# Altium PCB PocketLab_DMM_EVT0.PcbDoc (part 2 of 3)
Units mm, origin at the board's own origin, x right, y up, seen from the top; angles counter-clockwise.
Board outline 62 x 90 mm, 4 copper layers (Top Layer, GND, PWR_SIG, Bottom Layer), stack 1.04 mm thick; 103 components, 76 nets, 390 pads, 94 vias.
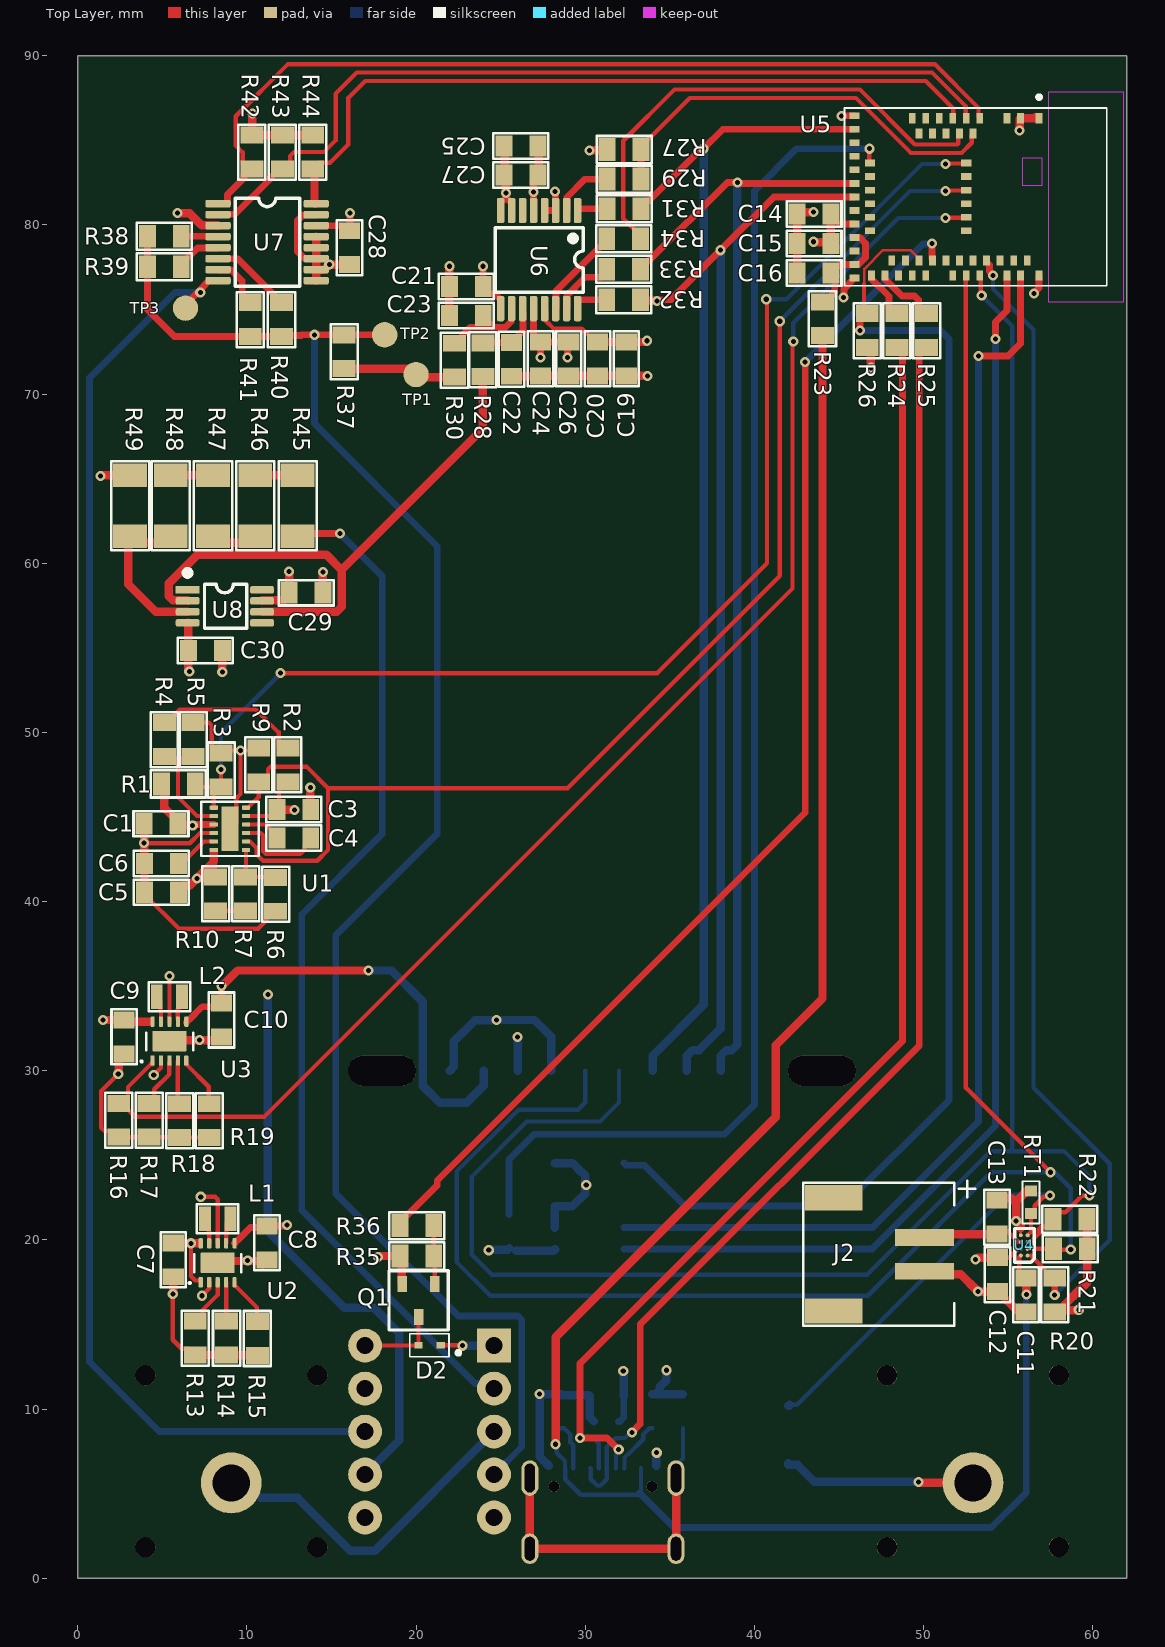
[diagram p0: Top Layer view]

## Part data (continued)
L1 L2: library part 74479275222, "FIXED IND 2.2UH 2A 190 MOHM SMD", Ambient Temperature Range High=85°C, Ambient Temperature Range Low=-40°C, Case Code (Imperial)=0805, Case Code (Metric)=2012, Current Rating=1A, DC Resistance (DCR)=166mΩ, Inductance Tolerance=20%, Manufacturer="Wurth Elektronik", Manufacturer Lifecycle Status=ACTIVE, Max Operating Temperature=125°C, RMS Current (Irms)=1.3A, Saturation Current=1.2A, Self Resonant Frequency=40MHz, Supplier Part Number=732-9708-1-ND, Test Frequency=1MHz, Case/Package=0805, Category="Fixed Inductors", ComponentLink1Description=https://datasheet.octopart.com:443/74479275222-W%C3%BCrth-Elektronik-datasheet-155263601.pdf?src-supplier=Wurth+Elektronik, ComponentLink1URL=https://datasheet.octopart.com:443/74479275222-W%C3%BCrth-Elektronik-datasheet-155263601.pdf?src-supplier=Wurth+Elektronik, ComponentLink2Description=https://datasheet.octopart.com:443/74479275222-Wurth-Elektronik-datasheet-181536646.pdf?src-supplier=Newark, ComponentLink2URL=https://datasheet.octopart.com:443/74479275222-Wurth-Elektronik-datasheet-181536646.pdf?src-supplier=Newark, ComponentLink3Description=https://datasheet.octopart.com:443/74479275222-W%C3%BCrth-Elektronik-datasheet-62333429.pdf?src-supplier=element14+APAC, ComponentLink3URL=https://datasheet.octopart.com:443/74479275222-W%C3%BCrth-Elektronik-datasheet-62333429.pdf?src-supplier=element14+APAC, ESR=176mΩ, Height=1mm, Height - Seated (Max)=1.4478mm, Length=2mm, Lifecycle Status=Production, Manufacturer Part Number=74479275222, Min Operating Temperature=-40°C, Mounting Technology="Surface Mount", Pins=2, Pricing="1=1.27, 50=1.056, 100=0.915, 1000=0.832 (USD)", REACH SVHC=Unknown, RoHS=Compliant, Shielding=Shielded, Stock=6231, Supplier=DigiKey, Tolerance=20%, Width=1.25mm, YEOL="1 = Estimated lifetime > 10 years"
Q1: "TRANS NPN 40V 0.2A SOT23-3", Case/Package=SOT-23, Clock Frequency=300MHz, Collector Base Voltage (VCBO)=60V, Collector Emitter Breakdown Voltage=40V, Collector Emitter Saturation Voltage=200mV, Current Rating=200mA, Emitter Base Voltage (VEBO)=6V, Manufacturer=onsemi, Manufacturer Lifecycle Status=ACTIVE, Max Junction Temperature (Tj)=150°C, Max Power Dissipation=300mW, Min Operating Temperature=-55°C, Power Dissipation=225mW, Supplier Part Number=MMBT3904LT1GOSDKR-ND, Category=BJTs, China RoHS=Compliant, Collector Emitter Voltage (VCEO)=40V, ComponentLink1Description=https://datasheet.octopart.com:443/MMBT3904LT1G-ON-Semiconductor-datasheet-11971584.pdf?src-supplier=Upverter, ComponentLink1URL=https://datasheet.octopart.com:443/MMBT3904LT1G-ON-Semiconductor-datasheet-11971584.pdf?src-supplier=Upverter, ComponentLink2Description=https://datasheet.octopart.com:443/MMBT3904LT1G-ON-Semiconductor-datasheet-618661.pdf?src-supplier=Upverter, ComponentLink2URL=https://datasheet.octopart.com:443/MMBT3904LT1G-ON-Semiconductor-datasheet-618661.pdf?src-supplier=Upverter, ComponentLink3Description=https://datasheet.octopart.com:443/MMBT3904LT1G-ON-Semiconductor-datasheet-8327178.pdf?src-supplier=Upverter, ComponentLink3URL=https://datasheet.octopart.com:443/MMBT3904LT1G-ON-Semiconductor-datasheet-8327178.pdf?src-supplier=Upverter, ComponentLink4Description=https://sigma.octopart.com:443/138897241/technical_drawing/ON-Semiconductor-MMBT3904LT1G.pdf?src-supplier=Upverter, ComponentLink4URL=https://sigma.octopart.com:443/138897241/technical_drawing/ON-Semiconductor-MMBT3904LT1G.pdf?src-supplier=Upverter, ComponentLink5Description=https://datasheet.octopart.com:443/MMBT3904LT1G-ON-Semiconductor-datasheet-94100684.pdf?src-supplier=Newark, ComponentLink5URL=https://datasheet.octopart.com:443/MMBT3904LT1G-ON-Semiconductor-datasheet-94100684.pdf?src-supplier=Newark, ComponentLink6Description=https://datasheet.octopart.com:443/MMBT3904LT1G-onsemi-datasheet-175423507.pdf?src-supplier=IHS, ComponentLink6URL=https://datasheet.octopart.com:443/MMBT3904LT1G-onsemi-datasheet-175423507.pdf?src-supplier=IHS, ComponentLink7Description=https://datasheet.octopart.com:443/MMBT3904LT1G-ON-Semiconductor-datasheet-15850735.pdf?src-supplier=element14+APAC, ComponentLink7URL=https://datasheet.octopart.com:443/MMBT3904LT1G-ON-Semiconductor-datasheet-15850735.pdf?src-supplier=element14+APAC, ComponentLink8Description=https://datasheet.octopart.com:443/MMBT3904LT1G-onsemi-datasheet-157205106.pdf?src-supplier=TME, ComponentLink8URL=https://datasheet.octopart.com:443/MMBT3904LT1G-onsemi-datasheet-157205106.pdf?src-supplier=TME, ComponentLink9Description=https://datasheet.octopart.com:443/MMBT3904LT1G-ON-Semiconductor-datasheet-42916338.pdf?src-supplier=Seeed+Studio, ComponentLink9URL=https://datasheet.octopart.com:443/MMBT3904LT1G-ON-Semiconductor-datasheet-42916338.pdf?src-supplier=Seeed+Studio, ComponentLink10Description=https://datasheet.octopart.com:443/MMBT3904LT1G-ON-Semiconductor-datasheet-14065146.pdf?src-supplier=iiiC, ComponentLink10URL=https://datasheet.octopart.com:443/MMBT3904LT1G-ON-Semiconductor-datasheet-14065146.pdf?src-supplier=iiiC, ComponentLink11Description=https://datasheet.octopart.com:443/MMBT3904LT1G-onsemi-datasheet-11078203.pdf?src-supplier=Master+Electronics, ComponentLink11URL=https://datasheet.octopart.com:443/MMBT3904LT1G-onsemi-datasheet-11078203.pdf?src-supplier=Master+Electronics, ComponentLink12Description=https://datasheet.octopart.com:443/MMBT3904LT1G-ON-Semiconductor-datasheet-9992889.pdf?src-supplier=RS+(Formerly+Allied+Electronics), ComponentLink12URL=https://datasheet.octopart.com:443/MMBT3904LT1G-ON-Semiconductor-datasheet-9992889.pdf?src-supplier=RS+(Formerly+Allied+Electronics), ComponentLink13Description=http://sigma.octopart.com:80/150618431/rohs_statement/ON-Semiconductor-MMBT3904LT1G.pdf?src-supplier=Compliance+Statements, ComponentLink13URL=http://sigma.octopart.com:80/150618431/rohs_statement/ON-Semiconductor-MMBT3904LT1G.pdf?src-supplier=Compliance+Statements, ComponentLink14Description=http://sigma.octopart.com:80/reach_statement/ON-Semiconductor-company-79.pdf?src-supplier=Compliance+Statements, ComponentLink14URL=http://sigma.octopart.com:80/reach_statement/ON-Semiconductor-company-79.pdf?src-supplier=Compliance+Statements, ComponentLink15Description=http://sigma.octopart.com:80/rohs_statement/Fairchild-Semiconductor-company-11.pdf?src-supplier=Compliance+Statements, ComponentLink15URL=http://sigma.octopart.com:80/rohs_statement/Fairchild-Semiconductor-company-11.pdf?src-supplier=Compliance+Statements, ComponentLink16Description=http://sigma.octopart.com:80/rohs_statement/Fairchild-Semiconductor-company-10.pdf?src-supplier=Compliance+Statements, ComponentLink16URL=http://sigma.octopart.com:80/rohs_statement/Fairchild-Semiconductor-company-10.pdf?src-supplier=Compliance+Statements, ComponentLink17Description=http://sigma.octopart.com:80/reach_statement/Fairchild-Semiconductor-company-9.pdf?src-supplier=Compliance+Statements, ComponentLink17URL=http://sigma.octopart.com:80/reach_statement/Fairchild-Semiconductor-company-9.pdf?src-supplier=Compliance+Statements, ComponentLink18Description=https://octopart.com:443/opatz8j6/c1?t=6Xn7ZrF6hysOUC84qlrSqY4wiQdrN-mPXKQ_8Rla8IkVly0DBC3XMOxgBnPoFxbPxSduxt1CU9xvbCNH0dZZ2fSPxrCiu0NHjXK1AEqfl5xODuP5YJP7pfSgZ8QNFl02tAnTqW6w1aVJmMTvNdbX5LfPzPLhtU1PYqNVsEPH2I4uNn2UF3IV2P2UT1zVRcnQIPoIWXKohBgaCPKWifMJG2N61Au2Wz4170xn6Vu5FG_CLPs0I4wu6gksT39gSmG6GKW27rzSZjefFxUNhsDMvXXdZPXoa_giO80NkyKEb8_6ha9AliWeLbEvMGgfnng9nYF8sw6XCX6uqkfeLxUIFVSSx4aXaZZhz9egcw&src-supplier=Compliance+Statements, ComponentLink18URL=https://octopart.com:443/opatz8j6/c1?t=6Xn7ZrF6hysOUC84qlrSqY4wiQdrN-mPXKQ_8Rla8IkVly0DBC3XMOxgBnPoFxbPxSduxt1CU9xvbCNH0dZZ2fSPxrCiu0NHjXK1AEqfl5xODuP5YJP7pfSgZ8QNFl02tAnTqW6w1aVJmMTvNdbX5LfPzPLhtU1PYqNVsEPH2I4uNn2UF3IV2P2UT1zVRcnQIPoIWXKohBgaCPKWifMJG2N61Au2Wz4170xn6Vu5FG_CLPs0I4wu6gksT39gSmG6GKW27rzSZjefFxUNhsDMvXXdZPXoa_giO80NkyKEb8_6ha9AliWeLbEvMGgfnng9nYF8sw6XCX6uqkfeLxUIFVSSx4aXaZZhz9egcw&src-supplier=Compliance+Statements, ComponentLink19Description=https://octopart.com:443/opatz8j6/c1?t=8IRzLcMOYTb9JijI-po6TFZCAUzXib-H1R20XCLpzmhIGre0bWRXe4ZO8lRdDfF3CLOGncXrdohN3KmiOTqxwjTHC1r89hWIZDbBVEUVc9Q9O159qKwDTUXpIzAsHJigIaeBGLyIo10FCT0IJpWkJe3Af8Ts36u8FHUZlIMCnry_JzPNglOFJd8Q37gYK_hPK5FL94xWLlsZYNj58V_g4S0R_SZTueiY5oHGNdfq_Zs3fbV3kHE__W-q6emv4yhSM8EHIIJwaXdr2iL-5-sB4yTOqwO_ItA84y4jC2VE_619edN7Ju53SNxRGHixzhXtKIq-sYkPqUptt85PTjBtSIydYnRzf0D6rRR5&src-supplier=Compliance+Statements, ComponentLink19URL=https://octopart.com:443/opatz8j6/c1?t=8IRzLcMOYTb9JijI-po6TFZCAUzXib-H1R20XCLpzmhIGre0bWRXe4ZO8lRdDfF3CLOGncXrdohN3KmiOTqxwjTHC1r89hWIZDbBVEUVc9Q9O159qKwDTUXpIzAsHJigIaeBGLyIo10FCT0IJpWkJe3Af8Ts36u8FHUZlIMCnry_JzPNglOFJd8Q37gYK_hPK5FL94xWLlsZYNj58V_g4S0R_SZTueiY5oHGNdfq_Zs3fbV3kHE__W-q6emv4yhSM8EHIIJwaXdr2iL-5-sB4yTOqwO_ItA84y4jC2VE_619edN7Ju53SNxRGHixzhXtKIq-sYkPqUptt85PTjBtSIydYnRzf0D6rRR5&src-supplier=Compliance+Statements, Contact Plating=Tin, Element Configuration=Single, Frequency=300MHz, Gain Bandwidth Product=300MHz, Height=1.11mm, hFE Min=30, Lead Free="Lead Free", Length=2.9mm, Lifecycle Status=Production, Manufacturer Part Number=MMBT3904LT1G, Max Breakdown Voltage=40V, Max Collector Current=200mA, Max Operating Temperature=150°C, Number of Elements=1, Number of Terminals=3, Packaging="Tape and Reel", Pins=3, Polarity=NPN, Pricing="1=0.14, 10=0.086, 100=0.0527, 500=0.03806, 1000=0.03329 (USD)", Radiation Hardening=No, REACH SVHC=Yes, RoHS=Compliant, Schedule B=8541210080, Stock=189758, Supplier=DigiKey, Transition Frequency=300MHz, Type="General Purpose", Voltage Rating (DC)=40V, Width=1.3mm
R1 R2 R3 R4 R5 R6 R7 R8 R9 R10 R11 R12 R13 R14 R15 R16 R17 R18 R19 R20 R21 R22 R23 R24 R25 R26 R27 R28 R29 R30 R31 R32 R33 R34 R35 R36 R37 R38 R39 R40 R41 R42 R43 R44 R50: library part R_0805, "RES 1/8W 0805", Case Code (Imperial)=0805, Case Code (Metric)=2012, Manufacturer="Stackpole Electronics", Manufacturer Package Identifier="0805 (2012 metric)", Manufacturer Part Number=RNCF0805TKY10K0, Max Operating Temperature=155°C, Max Power Dissipation=125mW, Min Operating Temperature=-55°C, Ratings=AEC-Q200, Supplier Part Number=RNCF0805TKY10K0CT-ND, Temperature Coefficient=5ppm/°C, Tolerance=0.01%, Working Voltage=150V, Case/Package=0805, Category="Chip SMD Resistors", ComponentLink1Description=https://datasheet.octopart.com:443/RNCF0805TKY10K0-Stackpole-Electronics-datasheet-182148124.pdf?src-supplier=IHS, ComponentLink1URL=https://datasheet.octopart.com:443/RNCF0805TKY10K0-Stackpole-Electronics-datasheet-182148124.pdf?src-supplier=IHS, ComponentLink2Description=https://datasheet.octopart.com:443/RNCF0805TKY10K0-Stackpole-Electronics-datasheet-12511394.pdf?src-supplier=Factory+Futures, ComponentLink2URL=https://datasheet.octopart.com:443/RNCF0805TKY10K0-Stackpole-Electronics-datasheet-12511394.pdf?src-supplier=Factory+Futures, ComponentLink3Description=https://datasheet.octopart.com:443/RNCF0805TKY10K0-Stackpole-Electronics-datasheet-141158876.pdf?src-supplier=Stackpole+Electronics, ComponentLink3URL=https://datasheet.octopart.com:443/RNCF0805TKY10K0-Stackpole-Electronics-datasheet-141158876.pdf?src-supplier=Stackpole+Electronics, ComponentLink4Description=https://datasheet.octopart.com:443/RNCF0805TKY10K0-Stackpole-Electronics-datasheet-28504821.pdf?src-supplier=Master+Electronics, ComponentLink4URL=https://datasheet.octopart.com:443/RNCF0805TKY10K0-Stackpole-Electronics-datasheet-28504821.pdf?src-supplier=Master+Electronics, ComponentLink5Description=https://datasheet.octopart.com/RNCF0805TKY10K0-Stackpole-Electronics-datasheet-11755897.pdf, ComponentLink5URL=https://datasheet.octopart.com/RNCF0805TKY10K0-Stackpole-Electronics-datasheet-11755897.pdf, ComponentLink6Description=http://sigma.octopart.com:80/15941409/materials_sheet/Stackpole-Electronics-RNCF0805TKY10K0.pdf?src-supplier=Compliance+Statements, ComponentLink6URL=http://sigma.octopart.com:80/15941409/materials_sheet/Stackpole-Electronics-RNCF0805TKY10K0.pdf?src-supplier=Compliance+Statements, ComponentLink7Description=http://sigma.octopart.com:80/141158212/rohs_statement/Stackpole-Electronics-RNCF0805TKY10K0.pdf?src-supplier=Compliance+Statements, ComponentLink7URL=http://sigma.octopart.com:80/141158212/rohs_statement/Stackpole-Electronics-RNCF0805TKY10K0.pdf?src-supplier=Compliance+Statements, ComponentLink8Description=http://sigma.octopart.com:80/141158211/reach_statement/Stackpole-Electronics-RNCF0805TKY10K0.pdf?src-supplier=Compliance+Statements, ComponentLink8URL=http://sigma.octopart.com:80/141158211/reach_statement/Stackpole-Electronics-RNCF0805TKY10K0.pdf?src-supplier=Compliance+Statements, Composition="Thin Film", Country of Origin=Taiwan, Export Control Classification Number (ECCN) Code=EAR99, Features="Moisture Resistant", Harmonized Tariff Schedule (HTS) Code=8533.21.00.30, Height=550µm, Introduction Date=2011-06-03, Lead Free="Lead Free", Length=2mm, Lifecycle Status=Production, Mounting Technology="Surface Mount", Number of Terminals=2, Number of Terminations=2, Packaging="Tape & Reel (TR)", Power Rating=125mW, Pricing="1=1.61, 10=1.334, 50=1.1716, 100=1.1105, 500=0.99044, 1000=0.94751, 2000=0.90945, 3000=0.8893, 5000=0.86599, 7000=0.85183, 10000=0.8378 (USD)", REACH SVHC=Yes, RoHS=Compliant, Schedule B="8533210045, 8533210045|8533210045|8533210045|8533210045|8533210045", Stock=4649, Supplier=DigiKey, Width=1.25mm
R45 R46 R47 R48: library part RGV3216P-3004-B-T1, "RES 3M OHM 0.1% 1/4W 1206", Case/Package=1206, Manufacturer=Susumu, Max Operating Temperature=155°C, Min Operating Temperature=-55°C, Power Rating=250mW, Ratings=AEC-Q200, Supplier Part Number=408-RGV3216P-3004-B-T1CT-ND, Temperature Coefficient=25ppm/°C, Tolerance=0.1%, Working Voltage=700V, Category="Chip SMD Resistors", ComponentLink1Description=https://datasheet.octopart.com:443/RGV3216P-3004-B-T1-Susumu-datasheet-182148317.pdf?src-supplier=IHS, ComponentLink1URL=https://datasheet.octopart.com:443/RGV3216P-3004-B-T1-Susumu-datasheet-182148317.pdf?src-supplier=IHS, Composition="Thin Film", Height=400µm, Length=3.2mm, Lifecycle Status=Production, Manufacturer Part Number=RGV3216P-3004-B-T1, Mounting Technology="Surface Mount", Number of Terminals=2, Pricing="1=0.4, 10=0.332, 50=0.291, 100=0.2751, 500=0.243 (USD)", REACH SVHC=Yes, RoHS=Compliant, Stock=5108, Supplier=DigiKey, Width=1.6mm
R49: library part RGV3216P-3603-B-T1, "RES 360K OHM 0.1% 1/4W 1206", Case/Package=1206, Manufacturer=Susumu, Max Operating Temperature=155°C, Min Operating Temperature=-55°C, Power Rating=250mW, Ratings=AEC-Q200, Supplier Part Number=408-RGV3216P-3603-B-T1CT-ND, Temperature Coefficient=25ppm/°C, Tolerance=0.1%, Working Voltage=700V, Category="Chip SMD Resistors", ComponentLink1Description=https://datasheet.octopart.com:443/RGV3216P-3603-B-T1-Susumu-datasheet-182148317.pdf?src-supplier=IHS, ComponentLink1URL=https://datasheet.octopart.com:443/RGV3216P-3603-B-T1-Susumu-datasheet-182148317.pdf?src-supplier=IHS, Composition="Thin Film", Export Control Classification Number (ECCN) Code=EAR99, Harmonized Tariff Schedule (HTS) Code=8533.21.00.30, Height=400µm, Introduction Date=2020-06-08, Length=3.2mm, Lifecycle Status=Production, Manufacturer Part Number=RGV3216P-3603-B-T1, Mounting Technology="Surface Mount", Number of Terminals=2, Pricing="1=0.38, 10=0.313, 50=0.2746, 100=0.2595, 500=0.22926 (USD)", REACH SVHC=Yes, RoHS=Compliant, Stock=572, Supplier=DigiKey, Width=1.6mm
RT1: library part NCU18XH103F6SRB, "THERMISTOR NTC 10KOHM 3380K 0603 / NTC Thermistor 10k 0603 (1608 Metric)", Case Code (Imperial)=0603, Case Code (Metric)=1608, Manufacturer=Murata, Max Current Rating=100µA, Max Operating Temperature=150°C, Min Operating Temperature=-55°C, Ratings=AEC-Q200, Supplier Part Number=490-18139-6-ND, Tolerance=1%, Voltage Rating=5V, Case/Package=0603, Category="Variable Resistors and Potentiometers", ComponentLink1Description=https://datasheet.octopart.com:443/NCU18XH103F6SRB-Murata-datasheet-182145414.pdf?src-supplier=IHS, ComponentLink1URL=https://datasheet.octopart.com:443/NCU18XH103F6SRB-Murata-datasheet-182145414.pdf?src-supplier=IHS, ComponentLink2Description=https://datasheet.octopart.com:443/NCU18XH103F6SRB-Murata-datasheet-65933868.pdf?src-supplier=Newark, ComponentLink2URL=https://datasheet.octopart.com:443/NCU18XH103F6SRB-Murata-datasheet-65933868.pdf?src-supplier=Newark, ComponentLink3Description=https://datasheet.octopart.com:443/NCU18XH103F6SRB-Murata-datasheet-181958153.pdf?src-supplier=Farnell, ComponentLink3URL=https://datasheet.octopart.com:443/NCU18XH103F6SRB-Murata-datasheet-181958153.pdf?src-supplier=Farnell, ComponentLink4Description=https://datasheet.octopart.com:443/NCU18XH103F6SRB-Murata-datasheet-138710245.pdf?src-supplier=ODG+(Origin+Data+Global), ComponentLink4URL=https://datasheet.octopart.com:443/NCU18XH103F6SRB-Murata-datasheet-138710245.pdf?src-supplier=ODG+(Origin+Data+Global), ComponentLink5Description=https://datasheet.octopart.com:443/NCU18XH103F6SRB-Murata-datasheet-141294565.pdf?src-supplier=Ciiva, ComponentLink5URL=https://datasheet.octopart.com:443/NCU18XH103F6SRB-Murata-datasheet-141294565.pdf?src-supplier=Ciiva, ComponentLink6Description=https://datasheet.octopart.com:443/NCU18XH103F6SRB-Murata-datasheet-165611801.pdf?src-supplier=TME, ComponentLink6URL=https://datasheet.octopart.com:443/NCU18XH103F6SRB-Murata-datasheet-165611801.pdf?src-supplier=TME, ComponentLink7Description=http://sigma.octopart.com:80/reach_statement/Murata-company-16.pdf?src-supplier=Compliance+Statements, ComponentLink7URL=http://sigma.octopart.com:80/reach_statement/Murata-company-16.pdf?src-supplier=Compliance+Statements, Export Control Classification Number (ECCN) Code=EAR99, Harmonized Tariff Schedule (HTS) Code=8533.40.80.70, Height=800µm, Introduction Date=2016-05-16, Length=1.6mm, Lifecycle Status=Production, Manufacturer Part Number=NCU18XH103F6SRB, Mounting Technology="Surface Mount", Number of Terminals=2, Pricing="1=0.14, 5=0.124, 10=0.117, 25=0.1076, 50=0.1016, 100=0.096, 500=0.08492, 1000=0.08083 (USD)", REACH SVHC=Yes, RoHS=Compliant, Schedule B="8533400080, 8533400080|8533400080, 8533400080|8533400080|8533400080, 8533400080|8533400080|8533400080|8533400080", Stock=103374, Supplier=DigiKey, Width=800µm, Working Voltage=5V
SW1: "Switch Tactile N.O. SPST Round Button Solder Tab 12VDC 200000Cycles 1.5N SMD Emboss T/R", Ambient Temperature Range High=70°C, Color=Silver, Contact Current Rating=50mA, Contact Resistance=100mΩ, Insulation Resistance=100MΩ, Manufacturer=Omron, Manufacturer Package Identifier=B3U-1000P(M), Max Voltage Rating (DC)=12V, Min Operating Temperature=-25°C, Operating Force=1.99N, Ratings="Dust Proof, IP40", Actuator Length=400µm, Category="Tactile Switches", ComponentLink1Description=https://datasheet.octopart.com:443/B3U-1000P-Omron-datasheet-62106914.pdf?src-supplier=IHS, ComponentLink1URL=https://datasheet.octopart.com:443/B3U-1000P-Omron-datasheet-62106914.pdf?src-supplier=IHS, ComponentLink2Description=https://datasheet.octopart.com:443/B3U-1000P-Omron-datasheet-10910421.pdf?src-supplier=RS+(Formerly+Allied+Electronics), ComponentLink2URL=https://datasheet.octopart.com:443/B3U-1000P-Omron-datasheet-10910421.pdf?src-supplier=RS+(Formerly+Allied+Electronics), ComponentLink3Description=https://datasheet.octopart.com:443/B3U-1000P-Omron-datasheet-5458533.pdf?src-supplier=Upverter, ComponentLink3URL=https://datasheet.octopart.com:443/B3U-1000P-Omron-datasheet-5458533.pdf?src-supplier=Upverter, ComponentLink4Description=https://datasheet.octopart.com:443/B3U-1000P-Omron-datasheet-11968313.pdf?src-supplier=SOS+electronic, ComponentLink4URL=https://datasheet.octopart.com:443/B3U-1000P-Omron-datasheet-11968313.pdf?src-supplier=SOS+electronic, ComponentLink5Description=https://datasheet.octopart.com:443/B3U-1000P-Omron-datasheet-110759174.pdf?src-supplier=Newark, ComponentLink5URL=https://datasheet.octopart.com:443/B3U-1000P-Omron-datasheet-110759174.pdf?src-supplier=Newark, ComponentLink6Description=https://datasheet.octopart.com:443/B3U-1000P-Omron-datasheet-506776.pdf?src-supplier=Newark, ComponentLink6URL=https://datasheet.octopart.com:443/B3U-1000P-Omron-datasheet-506776.pdf?src-supplier=Newark, ComponentLink7Description=https://datasheet.octopart.com:443/B3U-1000P-Omron-datasheet-17589256.pdf?src-supplier=TME, ComponentLink7URL=https://datasheet.octopart.com:443/B3U-1000P-Omron-datasheet-17589256.pdf?src-supplier=TME, Contact Material=Silver, Contact Plating=Silver, Current Rating=50mA, Depth=2.5mm, Electrical Life=200kcycles, Height=1.2mm, Illumination Type="Illuminated, Non-Illuminated", Lead Free="Lead Free", Length=3mm, Life (Cycles)=200kcycles, Lifecycle Status=Production, Manufacturer Part Number=B3U-1000P, Max Current Rating=50mA, Max Operating Temperature=70°C, Mechanical Life=200kcycles, Mounting Technology="Surface Mount", Number of Positions=1, Packaging="Tape and Reel", Pins=2, Pricing="3500=0.5448, 7000=0.5014 (USD)", REACH SVHC=Yes, RoHS=Compliant, Sealable="DUST PROOF", Stock=392000, Supplier="Arrow Electronics", Supplier Part Number=B3U-1000P, Switch Function=Off-Mom, Switch Travel=150µm, Termination=Solder, Throw Configuration=SPST, Voltage Rating (DC)=12V, Weight=21.99923mg, Width=2.5mm
TP1 TP2 TP3: library part TP_1.0MM, "SMD TEST POINT"
U1: library part LM27762DSSR, "IC REG CHARGE PUMP ADJ DL 12WSON", Ambient Temperature Range High=85°C, Manufacturer="Texas Instruments", Manufacturer Lifecycle Status=ACTIVE, Max Junction Temperature (Tj)=125°C, Max Supply Voltage=5.5V, Min Operating Temperature=-40°C, Min Supply Voltage=2.7V, Nominal Supply Current=390µA, Output Current=250mA, Supplier Part Number=296-47331-1-ND, Switching Frequency=2MHz, Category="Voltage Regulators - Linear", ComponentLink1Description=https://sigma.octopart.com:443/81678663/technical_drawing/Texas-Instruments-LM27762DSSR.pdf?src-supplier=Texas+Instruments, ComponentLink1URL=https://sigma.octopart.com:443/81678663/technical_drawing/Texas-Instruments-LM27762DSSR.pdf?src-supplier=Texas+Instruments, ComponentLink2Description=https://octopart.com:443/opatz8j6/c1?t=qGW3fZh6rbzjUEzWZb6D8x9Jd9q3NO4LuKNvuUXcmNXskur0gYfHNShI7YjLnZogpd9ODFUKBHAv0xEzrjgN1BrsAvb29dPQQtindGASqOiPvbwzUittcVayaRgSMCg2PyURFa49judjR-51k2Tshh2avWoGwgQTauKHgHZEW1Mi2Ud_2FxC8vdIlRVQjGWOBt96NojCfVSAyBJQfCKlmTnPWgt58ShaVxaP5ZSWMNo2UvVyuLyEyCOAoev3GSskx9qmSgTKhJ3cbX_JDZZZwra_UfmHMAAkkgUJY6mu---dDSxqTCFw1RGrjYUCVaQP1B7olnvSIU_HpNn-bohxhx31vydGjWcs0o-BEum2ZwS4owcBlLlUIutb_ZCv9KPs3-sdHNg&src-supplier=Texas+Instruments, ComponentLink2URL=https://octopart.com:443/opatz8j6/c1?t=qGW3fZh6rbzjUEzWZb6D8x9Jd9q3NO4LuKNvuUXcmNXskur0gYfHNShI7YjLnZogpd9ODFUKBHAv0xEzrjgN1BrsAvb29dPQQtindGASqOiPvbwzUittcVayaRgSMCg2PyURFa49judjR-51k2Tshh2avWoGwgQTauKHgHZEW1Mi2Ud_2FxC8vdIlRVQjGWOBt96NojCfVSAyBJQfCKlmTnPWgt58ShaVxaP5ZSWMNo2UvVyuLyEyCOAoev3GSskx9qmSgTKhJ3cbX_JDZZZwra_UfmHMAAkkgUJY6mu---dDSxqTCFw1RGrjYUCVaQP1B7olnvSIU_HpNn-bohxhx31vydGjWcs0o-BEum2ZwS4owcBlLlUIutb_ZCv9KPs3-sdHNg&src-supplier=Texas+Instruments, ComponentLink3Description=https://sigma.octopart.com:443/49250719/technical_drawing/Texas-Instruments-LM27762DSSR.pdf?src-supplier=Texas+Instruments, ComponentLink3URL=https://sigma.octopart.com:443/49250719/technical_drawing/Texas-Instruments-LM27762DSSR.pdf?src-supplier=Texas+Instruments, ComponentLink4Description=https://datasheet.octopart.com:443/LM27762DSSR-Texas-Instruments-datasheet-159115144.pdf?src-supplier=LCSC, ComponentLink4URL=https://datasheet.octopart.com:443/LM27762DSSR-Texas-Instruments-datasheet-159115144.pdf?src-supplier=LCSC, ComponentLink5Description=https://datasheet.octopart.com:443/LM27762DSSR-Texas-Instruments-datasheet-164414993.pdf?src-supplier=SHENGYU+ELECTRONICS, ComponentLink5URL=https://datasheet.octopart.com:443/LM27762DSSR-Texas-Instruments-datasheet-164414993.pdf?src-supplier=SHENGYU+ELECTRONICS, ComponentLink6Description=https://datasheet.octopart.com:443/LM27762DSSR-Texas-Instruments-datasheet-150873029.pdf?src-supplier=Arrow.cn, ComponentLink6URL=https://datasheet.octopart.com:443/LM27762DSSR-Texas-Instruments-datasheet-150873029.pdf?src-supplier=Arrow.cn, ComponentLink7Description=https://datasheet.octopart.com:443/LM27762DSSR-Texas-Instruments-datasheet-137316104.pdf?src-supplier=Future+Electronics, ComponentLink7URL=https://datasheet.octopart.com:443/LM27762DSSR-Texas-Instruments-datasheet-137316104.pdf?src-supplier=Future+Electronics, ComponentLink8Description=http://sigma.octopart.com:80/reach_statement/Texas-Instruments-company-64.pdf?src-supplier=Compliance+Statements, ComponentLink8URL=http://sigma.octopart.com:80/reach_statement/Texas-Instruments-company-64.pdf?src-supplier=Compliance+Statements, ComponentLink9Description=http://sigma.octopart.com:80/conflict_mineral_statement/Texas-Instruments-company-63.pdf?src-supplier=Compliance+Statements, ComponentLink9URL=http://sigma.octopart.com:80/conflict_mineral_statement/Texas-Instruments-company-63.pdf?src-supplier=Compliance+Statements, Height=800µm, Lead Free="Lead Free", Length=2mm, Lifecycle Status=Production, Manufacturer Part Number=LM27762DSSR, Max Operating Temperature=85°C, Number of Outputs=2, Pins=12, Pricing="1=2.31, 10=1.71, 25=1.56, 100=1.3951, 250=1.3166, 500=1.27756 (USD)", Quiescent Current=390µA, RoHS=Compliant, Schedule B="8542390000, 8542390000|8542390000|8542390000|8542390000|8542390000|8542390000|8542390000|8542390000|8542390000|8542390000|8542390000|8542390000|8542390000|8542390000|8542390000|8542390000|8542390000|8542390000|8542390000|8542390000|8542390000|8542390000|8542390000|85", Stock=13224, Supplier=DigiKey, Thickness=750µm, Topology="Charge Pump", Width=3mm
U2 U3: "Buck-Boost Yes 2MHz Programmable 1 5V 1.8V 5.5V 1.8V WFDFN-10(EP) SMD mount，glue mount", Ambient Temperature Range High=85°C, Manufacturer="Texas Instruments", Manufacturer Lifecycle Status=ACTIVE, Max Junction Temperature (Tj)=125°C, Max Supply Voltage=5.5V, Min Operating Temperature=-40°C, Min Supply Voltage=1.8V, Nominal Supply Current=75nA, Output Current=400mA, Supplier Part Number=296-TPS63900DSKRCT-ND, Category="Voltage Regulators - Switching", ComponentLink1Description=https://octopart.com:443/opatz8j6/c1?t=gNq7TF7tSc49575p1d7uQl57FG5jDcXkBMLDW126I0WEQXkIA098L7NZ_qYIg46R_mEVXP1ZudpvOxjPLOhYoc06XnsUOV98jXAUQjPdW1_iilG_HodZwudlgmeapdYC8MAuybCwXlRSug8DpFgDV6n19M2t72yPupKnKBICJAZReI5Lq1DGSmAwUp7QA5MYuFyWz9dU1JD3eDKFwEa58FXMp_CwZg0PtROB0XhS2GMmy06385Rr9d3ZI0uVTLlC2W9932pjiund1zMk-BM6Pzi5pbwXOYVWoA5-yh00xZrcV1pvqKriKK6xtSp4eHkE3zoXcOTJDfsL5RkPJugosAbBFYdKExzLzKYtWdpNjWSChq_8Wr0YsJke445TpHqaXJCaFbe7Tg&src-supplier=Texas+Instruments, ComponentLink1URL=https://octopart.com:443/opatz8j6/c1?t=gNq7TF7tSc49575p1d7uQl57FG5jDcXkBMLDW126I0WEQXkIA098L7NZ_qYIg46R_mEVXP1ZudpvOxjPLOhYoc06XnsUOV98jXAUQjPdW1_iilG_HodZwudlgmeapdYC8MAuybCwXlRSug8DpFgDV6n19M2t72yPupKnKBICJAZReI5Lq1DGSmAwUp7QA5MYuFyWz9dU1JD3eDKFwEa58FXMp_CwZg0PtROB0XhS2GMmy06385Rr9d3ZI0uVTLlC2W9932pjiund1zMk-BM6Pzi5pbwXOYVWoA5-yh00xZrcV1pvqKriKK6xtSp4eHkE3zoXcOTJDfsL5RkPJugosAbBFYdKExzLzKYtWdpNjWSChq_8Wr0YsJke445TpHqaXJCaFbe7Tg&src-supplier=Texas+Instruments, ComponentLink2Description=http://sigma.octopart.com:80/reach_statement/Texas-Instruments-company-64.pdf?src-supplier=Compliance+Statements, ComponentLink2URL=http://sigma.octopart.com:80/reach_statement/Texas-Instruments-company-64.pdf?src-supplier=Compliance+Statements, ComponentLink3Description=http://sigma.octopart.com:80/conflict_mineral_statement/Texas-Instruments-company-63.pdf?src-supplier=Compliance+Statements, ComponentLink3URL=http://sigma.octopart.com:80/conflict_mineral_statement/Texas-Instruments-company-63.pdf?src-supplier=Compliance+Statements, Height=800µm, Length=2.5mm, Lifecycle Status=Production, Manufacturer Part Number=TPS63900DSKR, Max Duty Cycle=99%, Max Operating Temperature=125°C, Number of Outputs=1, Pins=10, Pricing="1=2.74, 10=2.042, 25=1.8668, 100=1.6749, 250=1.5834, 500=1.54836, 3000=1.42668, 6000=1.39922 (USD)", RoHS=Compliant, Stock=32045, Supplier=DigiKey, Thickness=750µm, Topology=Buck-Boost, Width=2.5mm
U4: "5.5V /Polymer 1 1A DSBGA-8(1.1x1.6) Battery Management ICs ROHS", Manufacturer="Texas Instruments", Manufacturer Lifecycle Status=ACTIVE, Supplier Part Number=296-BQ25180YBGRCT-ND, Category="Battery Management", ComponentLink1Description=https://sigma.octopart.com:443/155720082/technical_drawing/Texas-Instruments-BQ25180YBGR.pdf?src-supplier=Texas+Instruments, ComponentLink1URL=https://sigma.octopart.com:443/155720082/technical_drawing/Texas-Instruments-BQ25180YBGR.pdf?src-supplier=Texas+Instruments, ComponentLink2Description=https://octopart.com:443/opatz8j6/c1?t=FgRCWYcMJHsZPNpfPzz_WR8vIqjwGMfRa0SdsFniFhPrh3vtdb6GhY6GHejVJgTUlbG4lFRXPlj5NxyYPwhbiYG4p17xkGQBD2p7YHYOAcHS2yUZr_WlZrBFbhb-UonEzVnaB5Ghr5vXkXqoEGqeoR7xOrtJrfoIGfJgWSYXlAKIjkMxwBT0EYjR8qqClumHTeDOTKrCcHE7gK9esH017LNumf_XquhCrPrOa7UbX9POSFM-OWMENnwvHC5BcqHpHp9BI5ef5ZRVnJ8IHWDtm02aX9O4Snlux5T14TkZJlWxTf4x7K0DU-zLtI6wQdNVHB0h9aazHM3I_eYPwzS32m5K0TB4PgRJn0dCtC1nh5xbwKs842dX9HlMeUuaaw4PMgLO2TU&src-supplier=Texas+Instruments, ComponentLink2URL=https://octopart.com:443/opatz8j6/c1?t=FgRCWYcMJHsZPNpfPzz_WR8vIqjwGMfRa0SdsFniFhPrh3vtdb6GhY6GHejVJgTUlbG4lFRXPlj5NxyYPwhbiYG4p17xkGQBD2p7YHYOAcHS2yUZr_WlZrBFbhb-UonEzVnaB5Ghr5vXkXqoEGqeoR7xOrtJrfoIGfJgWSYXlAKIjkMxwBT0EYjR8qqClumHTeDOTKrCcHE7gK9esH017LNumf_XquhCrPrOa7UbX9POSFM-OWMENnwvHC5BcqHpHp9BI5ef5ZRVnJ8IHWDtm02aX9O4Snlux5T14TkZJlWxTf4x7K0DU-zLtI6wQdNVHB0h9aazHM3I_eYPwzS32m5K0TB4PgRJn0dCtC1nh5xbwKs842dX9HlMeUuaaw4PMgLO2TU&src-supplier=Texas+Instruments, ComponentLink3Description=https://datasheet.octopart.com:443/BQ25180YBGR-Texas-Instruments-datasheet-165811111.pdf?src-supplier=Augswan, ComponentLink3URL=https://datasheet.octopart.com:443/BQ25180YBGR-Texas-Instruments-datasheet-165811111.pdf?src-supplier=Augswan, ComponentLink4Description=https://datasheet.octopart.com:443/BQ25180YBGR-Texas-Instruments-datasheet-169738557.pdf?src-supplier=LCSC, ComponentLink4URL=https://datasheet.octopart.com:443/BQ25180YBGR-Texas-Instruments-datasheet-169738557.pdf?src-supplier=LCSC, ComponentLink5Description=http://sigma.octopart.com:80/reach_statement/Texas-Instruments-company-64.pdf?src-supplier=Compliance+Statements, ComponentLink5URL=http://sigma.octopart.com:80/reach_statement/Texas-Instruments-company-64.pdf?src-supplier=Compliance+Statements, ComponentLink6Description=http://sigma.octopart.com:80/conflict_mineral_statement/Texas-Instruments-company-63.pdf?src-supplier=Compliance+Statements, ComponentLink6URL=http://sigma.octopart.com:80/conflict_mineral_statement/Texas-Instruments-company-63.pdf?src-supplier=Compliance+Statements, Height=500µm, Length=1.2mm, Lifecycle Status=Production, Manufacturer Part Number=BQ25180YBGR, Pins=8, Pricing="1=3.01, 10=2.253, 25=2.0632, 100=1.854, 250=1.75436, 500=1.72278 (USD)", RoHS=Compliant, Stock=1782, Supplier=DigiKey, Thickness=254µm, Width=800µm
U5: "802.15.4, Bluetooth Bluetooth v5.4, ZigbeeÂ® Transceiver Module 2.36GHz ~ 2.5GHz Integrated, Chip Surface Mount", Package="SMD-61 Raytac Corporation", Check_prices=https://www.snapeda.com/parts/MDBT50Q-1MV2/Raytac+Corporation/view-part/?ref=eda, MF="Raytac Corporation", MP=MDBT50Q-1MV2, SnapEDA_Link=https://www.snapeda.com/parts/MDBT50Q-1MV2/Raytac+Corporation/view-part/?ref=snap
U6: "IC ADC 24BIT 16-TSSOP", Case/Package=TSSOP, Manufacturer="Texas Instruments", Manufacturer Lifecycle Status=ACTIVE, Max Operating Temperature=125°C, Max Power Dissipation=1.4mW, Max Supply Voltage=5.5V, Min Operating Temperature=-40°C, Min Supply Voltage=2.3V, Operating Supply Voltage=3.3V, Power Dissipation=2.1mW, Supplier Part Number=296-39851-1-ND, Category="Analog to Digital Converters (ADCs)", ComponentLink1Description=https://sigma.octopart.com:443/189718192/technical_drawing/Texas-Instruments-ADS1220IPWR.pdf?src-supplier=Texas+Instruments, ComponentLink1URL=https://sigma.octopart.com:443/189718192/technical_drawing/Texas-Instruments-ADS1220IPWR.pdf?src-supplier=Texas+Instruments, ComponentLink2Description=https://octopart.com:443/opatz8j6/c1?t=BlS52qY4T5w8A7uK_HjLnxNLo9uk59_RYYMo9dLg0oO2cMi-18kly1ZKdJe2qPDbDx0L3HGY3S0lPPROM-3fqYypc313GSW7Fpej1V_dswjApvxmFTIjwfDPB1ymsghsFF1peKDlQOxzEpi3-yutT465CQ4oB2kBM5WiUtcuO2mNwVfA-IWeTnfaQkyq_eP44orWu8X7V80Vir55GCaJJNnMK-Ri4IeRAVNqOHGPv58lWeY5n0YLEge8tXITw4M_cEEmDQjwStTzdakIywHbSoPuvyHyNGZa9yCPf7we15vfNr4UaaVf2RPbk6oPXb3t4UGaAVG0yF_k74fBuIdALnp98NtoYrGWv25hANVM8CHAoYO8J4TnYaXtD7mx8qsTT-nMoCs&src-supplier=Texas+Instruments, ComponentLink2URL=https://octopart.com:443/opatz8j6/c1?t=BlS52qY4T5w8A7uK_HjLnxNLo9uk59_RYYMo9dLg0oO2cMi-18kly1ZKdJe2qPDbDx0L3HGY3S0lPPROM-3fqYypc313GSW7Fpej1V_dswjApvxmFTIjwfDPB1ymsghsFF1peKDlQOxzEpi3-yutT465CQ4oB2kBM5WiUtcuO2mNwVfA-IWeTnfaQkyq_eP44orWu8X7V80Vir55GCaJJNnMK-Ri4IeRAVNqOHGPv58lWeY5n0YLEge8tXITw4M_cEEmDQjwStTzdakIywHbSoPuvyHyNGZa9yCPf7we15vfNr4UaaVf2RPbk6oPXb3t4UGaAVG0yF_k74fBuIdALnp98NtoYrGWv25hANVM8CHAoYO8J4TnYaXtD7mx8qsTT-nMoCs&src-supplier=Texas+Instruments, ComponentLink3Description=https://sigma.octopart.com:443/116621398/technical_drawing/Texas-Instruments-ADS1220IPWR.pdf?src-supplier=Texas+Instruments, ComponentLink3URL=https://sigma.octopart.com:443/116621398/technical_drawing/Texas-Instruments-ADS1220IPWR.pdf?src-supplier=Texas+Instruments, ComponentLink4Description=https://datasheet.octopart.com:443/ADS1220IPWR-Texas-Instruments-datasheet-37484719.pdf?src-supplier=Texas+Instruments, ComponentLink4URL=https://datasheet.octopart.com:443/ADS1220IPWR-Texas-Instruments-datasheet-37484719.pdf?src-supplier=Texas+Instruments, ComponentLink5Description=https://datasheet.octopart.com:443/ADS1220IPWR-Texas-Instruments-datasheet-16941236.pdf?src-supplier=Texas+Instruments, ComponentLink5URL=https://datasheet.octopart.com:443/ADS1220IPWR-Texas-Instruments-datasheet-16941236.pdf?src-supplier=Texas+Instruments, ComponentLink6Description=https://datasheet.octopart.com:443/ADS1220IPWR-Texas-Instruments-datasheet-15761565.pdf?src-supplier=Texas+Instruments, ComponentLink6URL=https://datasheet.octopart.com:443/ADS1220IPWR-Texas-Instruments-datasheet-15761565.pdf?src-supplier=Texas+Instruments, ComponentLink7Description=https://sigma.octopart.com:443/49249815/technical_drawing/Texas-Instruments-ADS1220IPWR.pdf?src-supplier=Texas+Instruments, ComponentLink7URL=https://sigma.octopart.com:443/49249815/technical_drawing/Texas-Instruments-ADS1220IPWR.pdf?src-supplier=Texas+Instruments, ComponentLink8Description=https://datasheet.octopart.com:443/ADS1220IPWR-Texas-Instruments-datasheet-159675426.pdf?src-supplier=SHENGYU+ELECTRONICS, ComponentLink8URL=https://datasheet.octopart.com:443/ADS1220IPWR-Texas-Instruments-datasheet-159675426.pdf?src-supplier=SHENGYU+ELECTRONICS, ComponentLink9Description=https://datasheet.octopart.com:443/ADS1220IPWR-Texas-Instruments-datasheet-165986363.pdf?src-supplier=LCSC, ComponentLink9URL=https://datasheet.octopart.com:443/ADS1220IPWR-Texas-Instruments-datasheet-165986363.pdf?src-supplier=LCSC, ComponentLink10Description=http://sigma.octopart.com:80/reach_statement/Texas-Instruments-company-64.pdf?src-supplier=Compliance+Statements, ComponentLink10URL=http://sigma.octopart.com:80/reach_statement/Texas-Instruments-company-64.pdf?src-supplier=Compliance+Statements, ComponentLink11Description=http://sigma.octopart.com:80/conflict_mineral_statement/Texas-Instruments-company-63.pdf?src-supplier=Compliance+Statements, ComponentLink11URL=http://sigma.octopart.com:80/conflict_mineral_statement/Texas-Instruments-company-63.pdf?src-supplier=Compliance+Statements, Contact Plating=Gold, Height=1.2mm, Interface=SPI, Lead Free="Lead Free", Length=5mm, Lifecycle Status=Production, Manufacturer Part Number=ADS1220IPWR, Mounting Technology="Surface Mount", Number of A/D Converters=1, Number of Analog Inputs=4, Number of Bits=24, Number of Channels=1, Number of Converters=1, Number of Elements=1, Number of Inputs=4, Pins=16, Polarity="Bipolar, Unipolar", Pricing="1=9.26, 10=7.201, 25=6.6852, 100=6.1189, 250=6.0022 (USD)", Radiation Hardening=No, Resolution=3B, RoHS=Compliant, Sampling Rate=2ksps, Schedule B=8542390000, Stock=4099, Supplier=DigiKey, Supply Type="Analog, Digital, Dual", Thickness=1mm, Width=4.4mm
U7: "4 4.9Ω Double Pole Four Throw (DP4T) TSSOP-16-175mil Analog Switches, Multiplexers ROHS", Ambient Temperature Range High=125°C, Case/Package=TSSOP, Manufacturer="Texas Instruments", Manufacturer Lifecycle Status=ACTIVE, Max Junction Temperature (Tj)=150°C, Max Supply Voltage=5.5V, Min Operating Temperature=-40°C, Min Supply Voltage=1.08V, Nominal Supply Current=8nA, On-State Resistance=1.8Ω, Supplier Part Number=296-53438-1-ND, -3db Bandwidth=135MHz, Category="Analog Switches and Multiplexers", ComponentLink1Description=https://sigma.octopart.com:443/189718192/technical_drawing/Texas-Instruments-TMUX1109PWR.pdf?src-supplier=Texas+Instruments, ComponentLink1URL=https://sigma.octopart.com:443/189718192/technical_drawing/Texas-Instruments-TMUX1109PWR.pdf?src-supplier=Texas+Instruments, ComponentLink2Description=https://octopart.com:443/opatz8j6/c1?t=lrqLgxqhOv5mRhW8sYJ4a35mRCMrE9WTtZWYXTuQwc5VAvwww8s9_bUQK_GQRUezFeOkf0xzYxG6KZlaBbzSWezLsR3Ws1FdDXdfW4axWjQfpVRIkxDZut9IKoVYaUCFWQ7mgDq3Uq0jZs542GlN5nOoAbYMoylPUhn7HG8S4oC_MsKR6_xb-xxtq9szC0WY0b2a732R0pvwpvNk8ULRxEmsgTiAI1WSnroIRWDIOCjtfrtMf_RErv3i4jOvYKsBRMPWwGfeEPsuFT0V9Dfo4Upi1cqJYXKTDqVzHb1Z1EghRgojnojRRDIQ4SqyN7fGhC2vBhmR1QUPkywNlMfenpxNL04oXP2EX7UUIAtjSyjFOVV8L-MsmAtzvJRRZT-j-bFIxkN0&src-supplier=Texas+Instruments, ComponentLink2URL=https://octopart.com:443/opatz8j6/c1?t=lrqLgxqhOv5mRhW8sYJ4a35mRCMrE9WTtZWYXTuQwc5VAvwww8s9_bUQK_GQRUezFeOkf0xzYxG6KZlaBbzSWezLsR3Ws1FdDXdfW4axWjQfpVRIkxDZut9IKoVYaUCFWQ7mgDq3Uq0jZs542GlN5nOoAbYMoylPUhn7HG8S4oC_MsKR6_xb-xxtq9szC0WY0b2a732R0pvwpvNk8ULRxEmsgTiAI1WSnroIRWDIOCjtfrtMf_RErv3i4jOvYKsBRMPWwGfeEPsuFT0V9Dfo4Upi1cqJYXKTDqVzHb1Z1EghRgojnojRRDIQ4SqyN7fGhC2vBhmR1QUPkywNlMfenpxNL04oXP2EX7UUIAtjSyjFOVV8L-MsmAtzvJRRZT-j-bFIxkN0&src-supplier=Texas+Instruments, ComponentLink3Description=https://sigma.octopart.com:443/116621398/technical_drawing/Texas-Instruments-TMUX1109PWR.pdf?src-supplier=Texas+Instruments, ComponentLink3URL=https://sigma.octopart.com:443/116621398/technical_drawing/Texas-Instruments-TMUX1109PWR.pdf?src-supplier=Texas+Instruments, ComponentLink4Description=https://datasheet.octopart.com:443/TMUX1109PWR-Texas-Instruments-datasheet-150595089.pdf?src-supplier=SHENGYU+ELECTRONICS, ComponentLink4URL=https://datasheet.octopart.com:443/TMUX1109PWR-Texas-Instruments-datasheet-150595089.pdf?src-supplier=SHENGYU+ELECTRONICS, ComponentLink5Description=http://sigma.octopart.com:80/reach_statement/Texas-Instruments-company-64.pdf?src-supplier=Compliance+Statements, ComponentLink5URL=http://sigma.octopart.com:80/reach_statement/Texas-Instruments-company-64.pdf?src-supplier=Compliance+Statements, ComponentLink6Description=http://sigma.octopart.com:80/conflict_mineral_statement/Texas-Instruments-company-63.pdf?src-supplier=Compliance+Statements, ComponentLink6URL=http://sigma.octopart.com:80/conflict_mineral_statement/Texas-Instruments-company-63.pdf?src-supplier=Compliance+Statements, Height=1.2mm, Length=5mm, Lifecycle Status=Production, Manufacturer Part Number=TMUX1109PWR, Max Operating Temperature=125°C, Number of Channels=2, Number of Circuits=2, Pins=16, Pricing="1=4.6, 10=3.492, 25=3.2144, 100=2.9097, 250=2.76432, 500=2.76318 (USD)", RoHS=Compliant, Schedule B="8542390000, 8542390000|8542390000, 8542390000|8542390000|8542390000|8542390000|8542390000", Stock=4345, Supplier=DigiKey, Thickness=1mm, Width=4.4mm
U8: "Precision rail-to-rail operational amplifier", Case/Package=VSSOP, Input Bias Current=5pA, Input Offset Voltage (Vos)=25µV, Manufacturer="Texas Instruments", Manufacturer Lifecycle Status=ACTIVE, Max Operating Temperature=125°C, Min Operating Temperature=-40°C, Operating Supply Current=1mA, Output Current per Channel=65mA, Supplier Part Number=296-44205-1-ND, Bandwidth=10MHz, Category="Amplifiers - Op Amps, Buffer, Instrumentation", ComponentLink1Description=https://sigma.octopart.com:443/178522223/technical_drawing/Texas-Instruments-OPA197IDGKR.pdf?src-supplier=Texas+Instruments, ComponentLink1URL=https://sigma.octopart.com:443/178522223/technical_drawing/Texas-Instruments-OPA197IDGKR.pdf?src-supplier=Texas+Instruments, ComponentLink2Description=https://octopart.com:443/opatz8j6/c1?t=FOH0RitQzD0XlKnT_NgRAgueVSVogVIH0_VtQKvX5g7tSbiKJHTY1QoPj-fRZWmhrDdG3-oaeD6KdjkigGqv_J-kshTw3jN_-Wt-WPxaVrD8pn1GPjwVJZnq1bl9XjIvoPWB7ZeLkdoepKv730yRgLbkP6aQFYp2DXOoQZirO_tZyNijjj9IWQhNZ18j4ImlA22DVwSTOFbSObjO7PzHae2dQ8oh_w5MV0QKndgc48Q4_peIBbvSJ5ut7KrVy2MbvjxsXzd0WmA-PvDo_y8MleauDzvSfGCoV1tfcR96dhtUS7VWbLwUJ1LuFIJRQw7vaioM7VjuujX3Pxl55TpYA49bpJc_AW7jaO84eqgHL_99ZB-Z4JMV0rb-u9axked6zFdf0Q&src-supplier=Texas+Instruments, ComponentLink2URL=https://octopart.com:443/opatz8j6/c1?t=FOH0RitQzD0XlKnT_NgRAgueVSVogVIH0_VtQKvX5g7tSbiKJHTY1QoPj-fRZWmhrDdG3-oaeD6KdjkigGqv_J-kshTw3jN_-Wt-WPxaVrD8pn1GPjwVJZnq1bl9XjIvoPWB7ZeLkdoepKv730yRgLbkP6aQFYp2DXOoQZirO_tZyNijjj9IWQhNZ18j4ImlA22DVwSTOFbSObjO7PzHae2dQ8oh_w5MV0QKndgc48Q4_peIBbvSJ5ut7KrVy2MbvjxsXzd0WmA-PvDo_y8MleauDzvSfGCoV1tfcR96dhtUS7VWbLwUJ1LuFIJRQw7vaioM7VjuujX3Pxl55TpYA49bpJc_AW7jaO84eqgHL_99ZB-Z4JMV0rb-u9axked6zFdf0Q&src-supplier=Texas+Instruments, ComponentLink3Description=https://datasheet.octopart.com:443/OPA197IDGKR-Texas-Instruments-datasheet-62062805.pdf?src-supplier=Texas+Instruments, ComponentLink3URL=https://datasheet.octopart.com:443/OPA197IDGKR-Texas-Instruments-datasheet-62062805.pdf?src-supplier=Texas+Instruments, ComponentLink4Description=https://sigma.octopart.com:443/49250154/technical_drawing/Texas-Instruments-OPA197IDGKR.pdf?src-supplier=Texas+Instruments, ComponentLink4URL=https://sigma.octopart.com:443/49250154/technical_drawing/Texas-Instruments-OPA197IDGKR.pdf?src-supplier=Texas+Instruments, ComponentLink5Description=https://datasheet.octopart.com:443/OPA197IDGKR-Texas-Instruments-datasheet-65713346.pdf?src-supplier=Newark, ComponentLink5URL=https://datasheet.octopart.com:443/OPA197IDGKR-Texas-Instruments-datasheet-65713346.pdf?src-supplier=Newark, ComponentLink6Description=https://datasheet.octopart.com:443/OPA197IDGKR-Texas-Instruments-datasheet-62333749.pdf?src-supplier=element14+APAC, ComponentLink6URL=https://datasheet.octopart.com:443/OPA197IDGKR-Texas-Instruments-datasheet-62333749.pdf?src-supplier=element14+APAC, ComponentLink7Description=https://datasheet.octopart.com:443/OPA197IDGKR-Texas-Instruments-datasheet-164361763.pdf?src-supplier=SHENGYU+ELECTRONICS, ComponentLink7URL=https://datasheet.octopart.com:443/OPA197IDGKR-Texas-Instruments-datasheet-164361763.pdf?src-supplier=SHENGYU+ELECTRONICS, ComponentLink8Description=https://datasheet.octopart.com:443/OPA197IDGKR-Texas-Instruments-datasheet-100480384.pdf?src-supplier=HQonline, ComponentLink8URL=https://datasheet.octopart.com:443/OPA197IDGKR-Texas-Instruments-datasheet-100480384.pdf?src-supplier=HQonline, ComponentLink9Description=https://datasheet.octopart.com:443/OPA197IDGKR-Texas-Instruments-datasheet-140571582.pdf?src-supplier=Arrow.cn, ComponentLink9URL=https://datasheet.octopart.com:443/OPA197IDGKR-Texas-Instruments-datasheet-140571582.pdf?src-supplier=Arrow.cn, ComponentLink10Description=http://sigma.octopart.com:80/reach_statement/Texas-Instruments-company-64.pdf?src-supplier=Compliance+Statements, ComponentLink10URL=http://sigma.octopart.com:80/reach_statement/Texas-Instruments-company-64.pdf?src-supplier=Compliance+Statements, ComponentLink11Description=http://sigma.octopart.com:80/conflict_mineral_statement/Texas-Instruments-company-63.pdf?src-supplier=Compliance+Statements, ComponentLink11URL=http://sigma.octopart.com:80/conflict_mineral_statement/Texas-Instruments-company-63.pdf?src-supplier=Compliance+Statements, Gain Bandwidth Product=10MHz, Height=0m, Lead Free="Lead Free", Length=3mm, Lifecycle Status=Production, Manufacturer Part Number=OPA197IDGKR, Mounting Technology="Surface Mount", Number of Amplifiers=1, Number of Channels=1, Number of Circuits=1, Packaging="Cut Tape", Pins=8, Pricing="1=2.1, 10=1.548, 25=1.4112, 100=1.2599, 250=1.18784, 500=1.1475 (USD)", REACH SVHC=No, RoHS=Compliant, Schedule B=8542330000, Slew Rate=20V/µs, Stock=2306, Supplier=DigiKey, Thickness=970µm, Width=3mm

## Via types
v1: diameter 0.6, hole 0.3, Top Layer to Bottom Layer, 94 vias

## Nets (pads, with @x,y where several pads share a name; then routed paths per layer and width w, separated by ;. In a path a pad name is that pad's centre, name@x,y a point inside that pad or via, vN(x,y) a via of type N, cw(c..) or ccw(c..) an arc to the next point about the centre after c; other vN are vias at no path point)
3V3: C2.1 C8.2 C14.1 C15.1 C19.2 C20.2 C28.2 D1.1 D2.1 J3.1 J6.3 K1.1 R20.1 R21.1 R22.1 R26.2 R50.2 U2.6 U5.28 U6.13 U7.14 | length 38.1
  Top Layer w0.254: D2.1 v1@22.755,13.775 ; U6.13 27.698,74.952 27.698,74.301 28.125,73.875 29.8,73.875 30.6,73.075 C20.2
  Top Layer w0.4: U2.6 9.35,19.875 9.35,19.9 9.425,19.975 9.45,19.975 10.209,20.734 11.109,20.734 C8.2 12.271,20.825 12.326,20.88 v1(12.38,20.88) ; U7.14 C28.2@15.525,79.95 ; C28.2 16.1,79.675 v1(16.1,80.7) ; C14.1@44.898,80.152 45,80.05 U5.28
  Top Layer w0.5: C20.2 C19.2 33.548,73.075 33.623,73.15 v1(33.65,73.15) ; v1(43.5,79) 43.519,78.981 44.444,78.981 C15.1 C14.1 ; R26.2 46.881,72.544 46.881,71.569 v1(46.9,71.55) ; R20.1 57.831,15.831 59.104,15.831 59.148,15.875 v1(59.175,15.875) ; R20.1@57.925,15.75 59.675,17.5 R21.1 59.662,19.487 59.662,21.213 R22.1
  Bottom Layer w0.4: D1.1 32.06,9.275 32.275,9.49 C2.1
  Bottom Layer w0.5: v1(22.75,13.75) 24.605,13.75 K1.1 ; v1(24.3,19.395) 24.319,19.414 25.414,19.414 R50.2 ; R50.2@25.931,19.355 28.125,19.355 28.22,19.45 J3.1 ; J6.3 v1(26,32) ; v1(32.25,12.25) 32.25,12.223 32.287,12.185 32.287,10.787 C2.1
5V: C1.1 C10.2 J6.2 R1.1 U1.3 U3.6 | length 31.7
  Top Layer w0.4: U3.6@6.425,32.85 6.5,32.925 6.5,32.95 6.575,33.025 6.6,33.025 7.359,33.784 8.259,33.784 C10.2@8.35,33.875 ; v1@6.698,44.552 U1.3 ; C10.2 v1(8.5,35)
  Top Layer w0.5: R1.1 5.127,46.777 5.127,45.527 5.927,44.727 C1.1 6.01,44.519 6.781,44.519 v1(6.8,44.5) ; v1(8.5,35) 8.527,35 9.452,35.925 v1(17.2,35.925)
  Bottom Layer w0.5: v1(17.2,35.925) 18.55,35.925 20.4,34.075 20.4,29.11 21.41,28.1 22.973,28.1 24,29.127 J6.2
5V_EN: R16.2 U3.1 U5.60 | length 84.9
  Top Layer w0.254: R16.2 R16.2@2.6,28.075 ; U3.1@4.425,30.55 4.425,30.379 4.423,30.377 4.311,30.377 2.973,29.039 2.973,28.448 R16.2@2.6,28.075 ; v1(42.3,73.1) 42.25,73.05 42.25,58.5 11.023,27.273 3.402,27.273 R16.2@2.6,28.075 ; v1(51.3,80.4) 51.325,80.425 52.5,80.425 U5.60
  Bottom Layer w0.254: v1(42.3,73.1) 42.3,74.2 48.5,80.4 v1(51.3,80.4)
+2V5A: C3.2 C21.2 C24.2 C26.2 C29.1 K1.7 R2.2 R27.1 U1.11 U6.9 U6.12 U8.7 | length 51
  Top Layer w0.254: U1.11 11.477,45.052 11.688,45.263 11.688,45.364 C3.2 ; C3.2@11.9,45.475 11.9,46.6 R2.2@12.077,46.777
  Top Layer w0.4: v1(23.95,77.55) 23.962,77.538 23.962,76.362 C21.2 ; C21.2@23.975,76.225 24.275,75.925 24.65,75.925 25,75.575 U6.9 ; U6.12 26.95,73.375 27.25,73.075 C24.2 ; v1(27.35,72.15) C24.2 ; v1(28.95,72.15) 28.95,73 C26.2 C24.2
  Top Layer w0.5: U8.7 10.922,57.8 12.175,57.8 12.5,58.125 C29.1 v1(12.5,59.5) ; C3.2 11.793,45.436 12.811,45.436 v1(12.827,45.419) ; v1(30.25,84.4) 30.269,84.419 31.269,84.419 R27.1
  GND w0.4: K1.7 16.99,6.19 K1.7@17,6.2
  Bottom Layer w0.5: v1(11.25,34.5) 11.25,20.5 15.75,16 17.5,16 19,14.5 19,8.145 K1.7
-2V5A: C5.2 C25.2 C27.1 C30.1 R10.1 U1.6 U6.5 U8.4 | length 12.4
  Top Layer w0.254: U1.6 8.1,43.052 8.102,43.05 R10.1@8.102,41.902
  Top Layer w0.4: U6.5 v1(26.95,81.95) C27.1@26.95,82.525
  Top Layer w0.5: C5.2@5.952,40.677 6.202,40.927 6.602,40.927 7.038,41.363 v1(7.047,41.372) v1@7.057,41.382 ; U8.4 6.525,56.475 6.55,56.45 C30.1 6.55,53.677 6.6,53.627 v1(6.6,53.6) ; 8.052,42.877 8.052,42.377 v1@7.057,41.382 ; R10.1 8.082,41.382 v1@7.057,41.382 ; C27.1@26.95,82.525 C27.1@27.25,82.825 ; C27.1@27.25,82.95 C25.2@27.25,84.65
ADC_CS: R27.2 R29.2 U5.5 | length 24.9
  Top Layer w0.254: R27.2@33.5,84.5 33.5,84.825 36.175,87.5 46,87.5 49.25,84.25 52.25,84.25 52.852,84.852 52.852,85.327 U5.5
  Top Layer w0.4: R29.2 R27.2 33.45,84.45 R27.2@33.5,84.5
ADC_DRDY: R34.2 U5.7 | length 29.3
  Top Layer w0.254: R34.2 33.275,79.35 32.25,80.375 32.25,84.967 35.283,88 46.233,88 49.483,84.75 52,84.75 52.052,84.802 52.052,85.327 U5.7
ADC_OHMS_IN: C23.2 R30.2 U6.10 | length 5.7
  Top Layer w0.4: R30.2 22.45,73 22.75,73.3 22.75,73.495 23.205,73.95 24.55,73.95 ; C23.2 23.975,74.525 24.55,73.95 ; U6.10 25.625,75.025 25.625,74.271 25.304,73.95 24.55,73.95
ADC_VOLT_IN: C22.1 R28.2 U6.11 | length 3.4
  Top Layer w0.4: R28.2@23.65,73.05 C22.1 ; C22.1@26.025,73.425 26.325,73.725 U6.11@26.325,74.75
ANALOG_PGOOD_N: R1.2 R3.2 U1.1 U5.56 | length 73.3
  Top Layer w0.254: R1.2@6.677,46.777 R3.2 8.475,46.779 v1(8.475,47.8) ; U1.1 R3.2@8.052,46.627 ; v1(12,53.5) 34.25,53.5 40.75,60 40.75,75.55 v1(40.7,75.6) ; v1(51.3,83.6) 51.325,83.625 52.5,83.625 U5.56
  Bottom Layer w0.254: v1@8.5,47.75 8.475,47.775 v1(8.475,47.8) 8.475,49.975 v1(12,53.5) ; v1(40.7,75.6) 41.9,75.6 49.9,83.6 v1(51.3,83.6)
ANALOG_PWR_EN: R9.2 U1.8 U1.12 U5.58 | length 77.8
  Top Layer w0.254: U1.8 9.954,43.55 10.191,43.55 10.573,43.168 10.573,42.794 10.958,42.408 14.158,42.408 14.802,43.052 14.802,46.702 ; U1.12 10.073,45.552 10.702,46.181 R9.2 10.877,47.077 11.25,47.45 11.25,47.828 11.399,47.977 13.527,47.977 14.802,46.702 ; v1(41.5,74.3) 41.5,59.25 28.952,46.702 14.802,46.702 ; v1(51.3,82) 51.325,82.025 52.5,82.025 U5.58
  Bottom Layer w0.254: v1(41.5,74.3) 49.2,82 v1(51.3,82)